# EAGLE board ard_card (EAGLE 5.09)
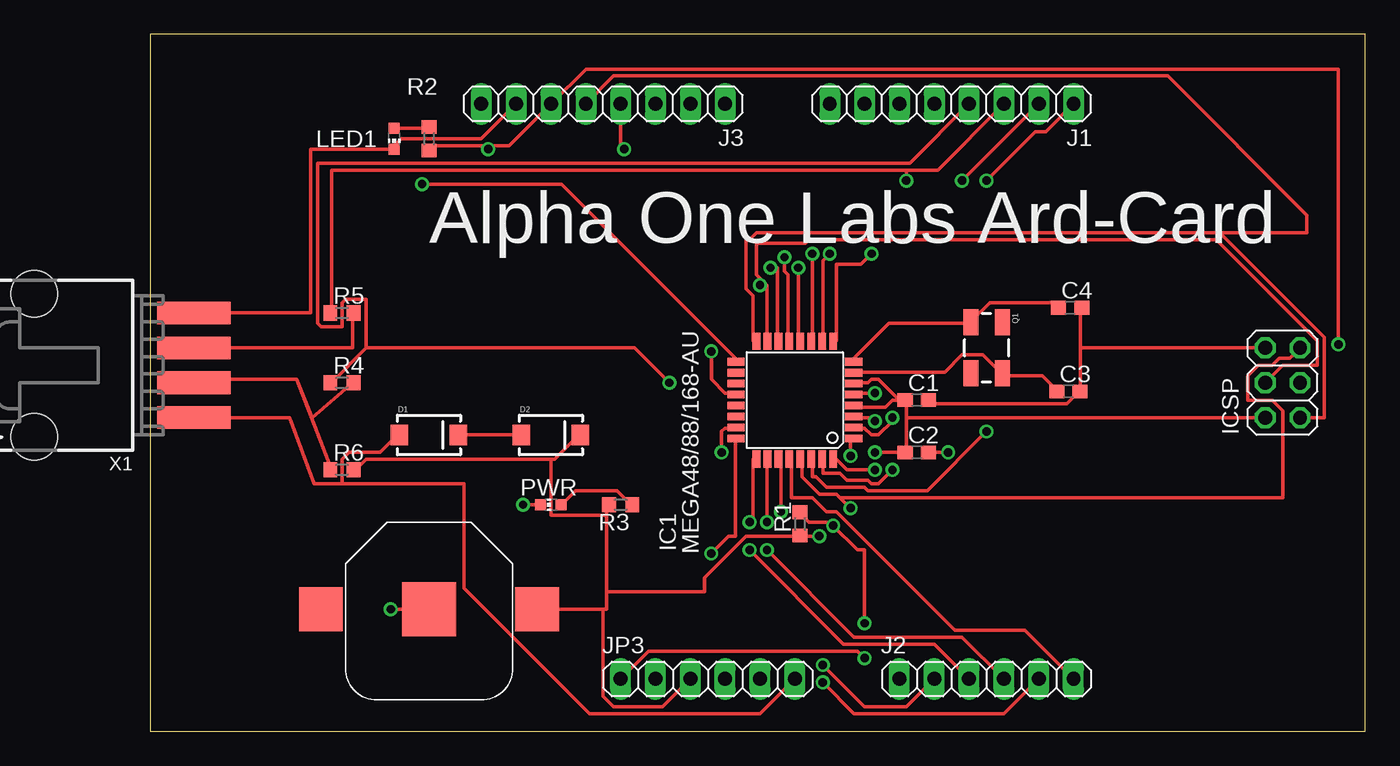
[diagram p0: board, top side]
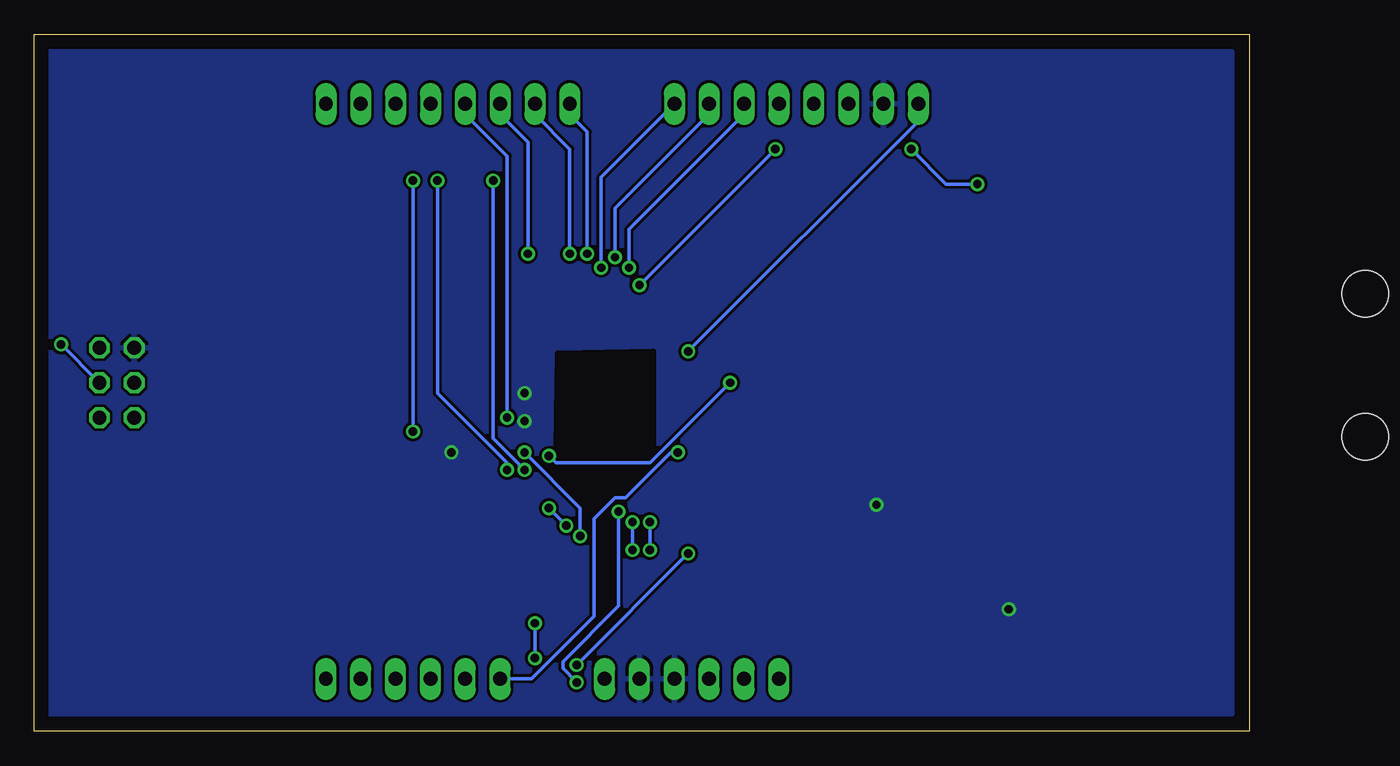
[diagram p1: board, bottom side, seen from below]

Size 88.57 x 50.79 mm. Coordinates in mm from the lower left corner, seen from the top.
Outline: 0,0 88.57,0 88.57,50.79 0,50.79 0,0
Copper layers (1*16): Top 0.035mm / dielectric 1.5mm / Bottom 0.035mm
Design rules "default": minimum track width 10mil, minimum drill 24mil, track to track 8mil, track to pad 8mil, pad to pad 8mil, via to via 8mil, smd to smd 8mil, copper to edge 40mil, drill to drill 8mil, minimum pad ring 10mil, minimum via ring 8mil, stop-mask expansion 4mil, vias tented up to drill 0mil, thermal gap 10mil
tKeepout: area 43.4,20.6 to 50.5,27.7
bKeepout: area 43.4,20.6 to 50.5,27.7
tRestrict: area 43.4,20.6 to 50.5,27.7
bRestrict: area 43.4,20.6 to 50.5,27.7
vRestrict: area 20.3,35.6 to 82.5,39.4

## Footprints (pad centres in the part's own frame; a part is rotated, then mirrored left to right if it is on the bottom)
BATTCON_12MM = smd 3.962 x 3.962: GND 0,0 | smd 3.175 x 3.175: PWR@1 -7.874,0; PWR@2 7.874,0
C0603 = smd 1.1 x 1: 1 -0.85,0; 2 0.85,0
SMA-DIODE = smd 1.27 x 1.47: A -2.15,0; C 2.15,0
TQFP32-08 = smd 1.27 x 0.559: 1 -4.293,2.8; 2 -4.293,2; 3 -4.293,1.2; 4 -4.293,0.4; 5 -4.293,-0.4; 6 -4.293,-1.2; 7 -4.293,-2; 8 -4.293,-2.8; 17 4.293,-2.8; 18 4.293,-2; 19 4.293,-1.2; 20 4.293,-0.4; 21 4.293,0.4; 22 4.293,1.2; 23 4.293,2; 24 4.293,2.8 | smd 0.559 x 1.27: 9 -2.8,-4.293; 10 -2,-4.293; 11 -1.2,-4.293; 12 -0.4,-4.293; 13 0.4,-4.293; 14 1.2,-4.293; 15 2,-4.293; 16 2.8,-4.293; 25 2.8,4.293; 26 2,4.293; 27 1.2,4.293; 28 0.4,4.293; 29 -0.4,4.293; 30 -1.2,4.293; 31 -2,4.293; 32 -2.8,4.293
2X03 = drill 1.016 octagon: 1 -2.54,-1.27; 2 -2.54,1.27; 3 0,-1.27; 4 0,1.27; 5 2.54,-1.27; 6 2.54,1.27
1X08 = drill 1.016 long: 1 -8.89,0; 2 -6.35,0; 3 -3.81,0; 4 -1.27,0; 5 1.27,0; 6 3.81,0; 7 6.35,0; 8 8.89,0
1X06 = drill 1.016 long: 1 -6.35,0; 2 -3.81,0; 3 -1.27,0; 4 1.27,0; 5 3.81,0; 6 6.35,0
CHIP-LED0603 = smd 0.8 x 0.8: A 0,-0.75; C 0,0.75
CRYSTAL-SMD-5X3 = smd 1.9 x 1.1: 1 -1.85,-1.15; 2 1.85,-1.15; 3 1.85,1.15; 4 -1.85,1.15
R0603 = smd 1 x 1.1: 1 -0.85,0; 2 0.85,0
15-91-04 = smd 1.651 x 5.334: 1 -3.81,-10.795; 2 -1.27,-10.795; 3 1.27,-10.795; 4 3.81,-10.795 | hole 3.404: -5.207,0.838; 5.207,0.838

## Placement (x,y rotation side)
BAT1  3v  [BATTCON_12MM]  20.32,8.89 180 top
C1  100nf  [C0603]  55.88,24.13 0 top
C2  100nf  [C0603]  55.88,20.32 0 top
C3  20pf  [C0603]  66.93,24.77 0 top
C4  20pf  [C0603]  67.06,30.86 0 top
D1  [SMA-DIODE]  20.32,21.59 0 top
D2  [SMA-DIODE]  29.21,21.59 0 top
IC1  MEGA48/88/168-AU  [TQFP32-08]  46.99,24.13 180 top
ICSP  [2X03]  82.55,25.4 90 top
J1  [1X08]  58.42,45.72 180 top
J2  [1X06]  60.96,3.81 0 top
J3  [1X08]  33.02,45.72 180 top
JP3  [1X06]  40.64,3.81 0 top
LED1  [CHIP-LED0603]  17.78,43.18 180 top
PWR  [CHIP-LED0603]  29.21,16.51 90 top
Q1  16MHz  [CRYSTAL-SMD-5X3]  60.96,27.94 270 top
R1  10k  [R0603]  47.37,15.11 90 top
R2  1k  [R0603]  20.32,43.18 90 top
R3  1k  [R0603]  34.29,16.51 180 top
R4  68  [R0603]  13.97,25.4 0 top
R5  68  [R0603]  13.97,30.48 0 top
R6  1k  [R0603]  13.97,19.05 0 top
X1  C-GRID-04-15-91  [15-91-04]  -7.62,26.67 90 top

## Library data of the parts
BAT1 D1 D2 Q1 = SparkFun.1
C1-C4 R1-R6 = rcl
IC1 = avr-6
ICSP J1-J3 JP3 = pinhead
LED1 PWR = led
X1 = con-molex

## Nets
AGND: IC1.21
AREF: IC1.20 J3.8
D+: IC1.32 J1.3 R5.1
D-: IC1.1 J1.4 R4.1
GND: BAT1.GND C1.2 C2.2 C3.2 C4.2 IC1.3 IC1.5 ICSP.6 J3.7 JP3.4 JP3.5 LED1.C PWR.C X1.4
MISO: IC1.16 ICSP.1 J3.5
MOSI: IC1.15 ICSP.4 J3.4
N$1: C3.1 IC1.7 Q1.3
N$2: C4.1 IC1.8 Q1.1
N$3: PWR.A R3.1
N$4: R5.2 X1.3
N$5: D1.C D2.A
N$6: LED1.A R2.2
N$7: IC1.23 J2.1
N$8: IC1.24 J2.2
N$9: IC1.25 J2.3
N$10: IC1.26 J2.4
N$11: IC1.27 J2.5
N$12: IC1.28 J2.6
N$13: IC1.30 J1.1
N$14: IC1.31 J1.2
N$15: R4.2 R6.1 X1.2
N$17: IC1.2 J1.5
N$18: IC1.9 J1.6
N$19: IC1.10 J1.7
N$20: IC1.11 J1.8
N$21: IC1.12 J3.1
N$22: IC1.13 J3.2
RESET: IC1.29 ICSP.5 JP3.1 R1.2
SCK: IC1.17 ICSP.3 J3.6 R2.1
SS: IC1.14 J3.3
V3.0: BAT1.PWR@1 C1.1 C2.1 D2.C IC1.4 IC1.6 ICSP.2 JP3.3 R1.1 R3.2 R6.2
VIN: D1.A JP3.6 X1.1

## Tracks (layer width: path | path; a pad name or v marks a point on that pad's centre or on a via)
AREF  (via drill 0.61)
  Top 0.254: v40.89,27.69 40.89,25.65 41.91,24.64 42.67,24.64 IC1.20
  Bottom 0.254: v40.89,27.69 24.13,44.45 J3.8
D+  (via drill 0.61)
  Top 0.254: 55.12,40.89 57.4,40.89 J1.3 | 55.12,40.89 13.21,40.89 13.21,30.48 R5.1 | v52.83,19.05 50.8,19.05 50.04,19.81 IC1.32 | 55.12,40.89 v55.12,40.13
  Bottom 0.254: v52.83,19.05 55.12,21.34 v55.12,40.13
D-  (via drill 0.61)
  Top 0.254: 15.75,27.94 13.21,25.4 R4.1 | 15.75,27.94 15.75,31.5 14.22,31.5 13.97,31.24 13.97,29.46 12.45,29.46 12.19,29.72 12.19,41.4 55.37,41.4 J1.4 | v51.05,20.07 51.05,21.08 IC1.1 | v37.85,25.4 35.31,27.94 15.75,27.94
  Bottom 0.254: v51.05,20.07 50.55,19.56 43.69,19.56 v37.85,25.4
GND  (via drill 0.61)
  Top 0.254: C1.2 56.9,24.13 57.15,23.88 66.8,23.88 67.56,24.64 C3.2 67.82,24.89 67.82,27.94 | 67.82,27.94 67.82,30.73 C4.2 | v27.18,16.51 PWR.C | J3.7 24.13,43.18 18.29,43.18 17.78,42.67 LED1.C 17.78,42.42 11.68,42.42 11.68,30.48 X1.4 | C2.2 v58.17,20.32 | v52.83,22.61 52.58,22.86 51.31,22.86 IC1.3 | v52.83,24.64 51.31,24.64 IC1.5 | v17.53,8.89 BAT1.GND | 67.82,27.94 ICSP.6
  pour Bottom: 1.27,49.53 87.63,49.53 87.63,1.27 1.27,1.27
MISO
  Top 0.254: 77.98,36.32 44.2,36.32 43.69,35.81 43.43,35.81 43.43,32.26 43.94,31.75 43.94,28.45 IC1.16 | 77.98,36.32 85.6,28.7 85.6,22.86 ICSP.1 | J3.5 33.78,47.75 74.17,47.75 84.33,37.59 84.33,36.32 77.98,36.32
MOSI  (via drill 0.61)
  Top 0.254: 44.7,32.77 44.2,33.27 44.2,35.56 47.75,35.56 48.01,35.81 77.72,35.81 85.09,28.45 85.09,26.67 82.55,26.67 ICSP.4 | 44.7,32.77 44.96,32.51 44.96,28.45 IC1.15 | J3.4 34.29,42.42 v34.54,42.42 | 44.7,32.77 v44.45,32.51
  Bottom 0.254: v44.45,32.51 v34.54,42.42
N$1
  Top 0.254: C3.1 66.04,24.89 65.02,25.91 62.23,25.91 Q1.3 61.98,26.16 60.71,27.43 59.18,27.43 57.91,26.16 51.31,26.16 IC1.7
N$2
  Top 0.254: C4.1 66.04,30.99 65.79,31.24 61.21,31.24 59.94,29.97 Q1.1 59.69,29.72 53.85,29.72 51.31,27.18 IC1.8
N$3
  Top 0.254: PWR.A 29.97,16.51 30.99,17.53 34.04,17.53 35.05,16.51 R3.1
N$4
  Top 0.254: R5.2 14.73,30.48 14.73,27.94 X1.3
N$5
  Top 0.254: D1.C D2.A
N$6
  Top 0.254: LED1.A 17.78,43.94 20.32,43.94 R2.2
N$7  (via drill 0.61)
  Top 0.254: v41.66,20.32 41.66,21.84 41.91,22.1 42.67,22.1 IC1.23
  Bottom 0.254: v41.66,20.32 42.16,20.32 45.47,17.02 46.23,17.02 47.75,15.49 47.75,8.38 52.32,3.81 J2.1
N$8  (via drill 0.61)
  Top 0.254: v40.89,12.95 42.16,14.22 42.67,14.22 42.67,21.08 IC1.24 | v49.02,4.83 52.07,1.78 55.12,1.78 J2.2
  Bottom 0.254: v49.02,4.83 v40.89,12.95
N$9  (via drill 0.61)
  Top 0.254: v43.69,15.24 43.94,15.24 43.94,19.81 IC1.25 | v43.69,13.21 50.55,6.35 57.15,6.35 J2.3
  Bottom 0.254: v43.69,13.21 v43.69,15.24
N$10  (via drill 0.61)
  Top 0.254: v44.96,15.24 44.96,19.81 IC1.26 | v44.96,13.21 51.31,6.86 59.18,6.86 J2.4
  Bottom 0.254: v44.96,13.21 v44.96,15.24
N$11  (via drill 0.61)
  Top 0.254: v45.97,16 45.97,19.81 IC1.27 | v49.02,3.56 51.31,1.27 62.23,1.27 J2.5
  Bottom 0.254: v45.97,16 45.97,9.14 50.04,5.08 50.04,4.57 v49.02,3.56
N$12
  Top 0.254: J2.6 63.75,7.37 58.67,7.37 50.04,16 49.28,16 48.26,17.02 46.74,17.02 46.74,19.81 IC1.28
N$13  (via drill 0.61)
  Top 0.254: v60.96,21.84 56.64,17.53 52.32,17.53 52.07,17.78 49.28,17.78 48.51,18.54 48.26,18.54 48.26,19.81 IC1.30 | v60.96,40.13 64.52,43.69 65.28,43.69 J1.1
  Bottom 0.254: v60.96,21.84 v60.96,40.13
N$14  (via drill 0.61)
  Top 0.254: v54.1,19.05 53.09,18.03 52.58,18.03 52.32,18.29 50.8,18.29 50.29,18.8 49.02,18.8 49.02,19.81 IC1.31 | v59.18,40.13 J1.2
  Bottom 0.254: v54.1,19.05 54.1,19.56 59.18,24.64 v59.18,40.13
N$15
  Top 0.254: 10.67,25.65 13.21,19.05 R6.1 | 10.67,25.65 11.81,22.86 14.73,25.4 R4.2 | 10.67,25.65 4.32,25.65 3.3,25.4 X1.2
N$17  (via drill 0.61)
  Top 0.254: v54.1,22.86 54.1,22.61 53.09,21.59 52.58,21.59 52.07,22.1 51.31,22.1 IC1.2
  Bottom 0.254: v54.1,22.86 54.1,41.91 57.15,44.96 J1.5
N$18  (via drill 0.61)
  Top 0.254: v52.58,34.8 51.82,34.04 50.04,34.04 50.04,28.45 IC1.9
  Bottom 0.254: v52.58,34.8 52.58,42.93 54.61,44.96 J1.6
N$19  (via drill 0.61)
  Top 0.254: v49.53,34.8 49.02,34.29 49.02,28.45 IC1.10
  Bottom 0.254: v49.53,34.8 49.53,42.42 52.07,44.96 J1.7
N$20  (via drill 0.61)
  Top 0.254: v48.26,34.8 48.26,28.45 IC1.11
  Bottom 0.254: v48.26,34.8 48.26,43.69 49.53,44.96 J1.8
N$21  (via drill 0.61)
  Top 0.254: v47.24,33.78 47.24,28.45 IC1.12
  Bottom 0.254: v47.24,33.78 47.24,40.39 J3.1
N$22  (via drill 0.61)
  Top 0.254: v46.23,34.54 46.23,33.53 46.48,33.27 46.48,28.45 IC1.13
  Bottom 0.254: v46.23,34.54 46.23,38.1 39.37,44.96 J3.2
RESET  (via drill 0.61)
  Top 0.254: 50.29,17.02 50.04,17.27 48.77,17.27 47.5,18.54 47.5,19.81 IC1.29 | v51.05,16.26 50.29,17.02 | R1.2 47.5,15.75 48.01,15.24 49.53,15.24 v49.78,14.99 51.56,13.21 52.07,13.21 v52.07,7.87 | JP3.1 36.32,5.84 51.56,5.84 v52.07,5.33 | ICSP.5 83.06,27.18 82.3,27.18 81.79,26.67 80.77,26.67 80.01,25.91 80.01,24.13 81.79,24.13 82.55,23.37 82.55,17.02 50.29,17.02
  Bottom 0.254: v49.78,14.99 v51.05,16.26 | v52.07,5.33 v52.07,7.87
SCK  (via drill 0.61)
  Top 0.254: 24.64,42.67 26.16,42.67 J3.6 31.75,48.26 86.61,48.26 v86.61,28.19 | 24.64,42.67 20.57,42.67 20.32,42.42 R2.1 | v19.81,39.88 29.97,39.88 42.67,27.18 IC1.17 | v24.64,42.42 24.64,42.67
  Bottom 0.254: v19.81,39.88 22.1,39.88 v24.64,42.42 | v86.61,28.19 ICSP.3
SS  (via drill 0.61)
  Top 0.254: v45.21,33.78 45.72,33.78 45.72,28.45 IC1.14
  Bottom 0.254: v45.21,33.78 45.21,36.58 36.83,44.96 J3.3
V3.0  (via drill 0.61)
  Top 0.254: 55.12,22.86 55.12,24.13 C1.1 | 55.12,22.86 55.12,20.32 C2.1 v52.83,20.32 | 54.61,24.13 54.1,24.13 53.59,23.62 51.31,23.62 IC1.4 | C1.1 54.61,24.13 | 54.61,24.13 53.09,25.65 52.58,25.65 52.32,25.4 51.31,25.4 IC1.6 | C1.1 54.86,24.13 | 55.12,22.86 ICSP.2 | 29.21,19.81 29.46,19.81 31.24,21.59 D2.C | 29.21,19.81 15.75,19.81 14.99,19.05 R6.2 | 33.27,10.16 33.27,8.89 33.02,8.89 | 33.27,15.75 33.27,10.16 | 33.27,15.75 33.27,16.51 R3.2 | 33.02,8.89 BAT1.PWR@1 | 33.27,10.16 40.39,10.16 40.39,11.18 43.43,14.22 47.24,14.22 R1.1 47.5,14.22 v48.77,14.22 | JP3.3 37.34,1.78 33.78,1.78 33.02,2.54 33.02,8.89 | 29.21,19.81 29.21,15.75 33.27,15.75
  Bottom 0.254: v52.83,20.32 48.77,16.26 v48.77,14.22
VIN
  Top 0.254: 13.97,18.03 13.97,19.81 14.48,20.32 16.76,20.32 18.03,21.59 D1.A | 13.97,18.03 11.94,18.03 10.16,22.86 X1.1 | JP3.6 44.45,1.27 32,1.27 22.86,10.41 22.86,18.03 13.97,18.03

## Text on the board
tNames: Alpha One Labs Ard-Card